# EAGLE board flip flop pcb 1.0 (EAGLE 6.5.0)
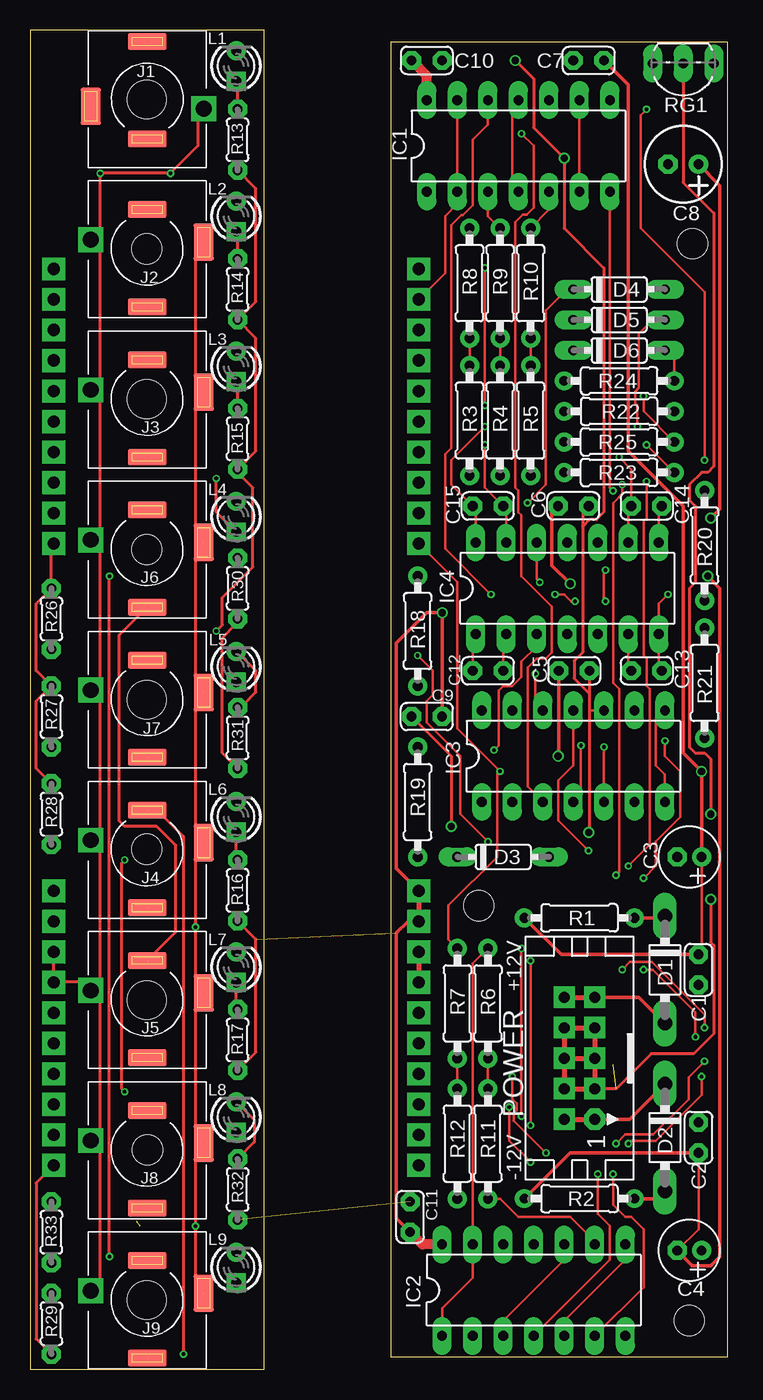
[diagram p0: board, top side]
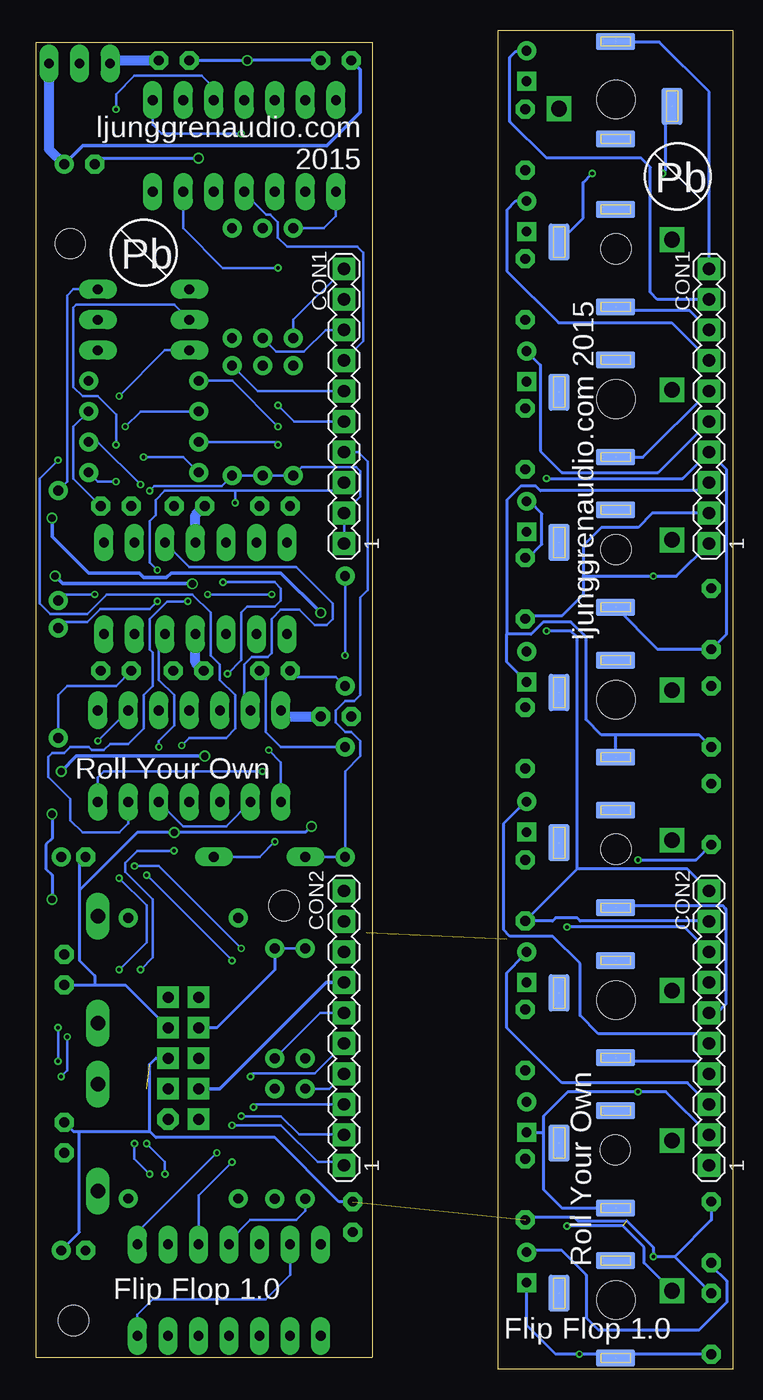
[diagram p1: board, bottom side, seen from below]

Size 58 x 111.5 mm. Coordinates in mm from the lower left corner, seen from the top.
Outline: 0,0 19.5,0 19.5,111.5 0,111.5 0,0
Outline: 30,110.5 30,1 58,1 58,110.5 30,110.5
Copper layers (1*16): Top 0.035mm / dielectric 1.5mm / Bottom 0.035mm
Design rules "hackvana 15 mil pads 24 mil thermal": minimum track width 6mil, minimum drill 0.3mm, track to track 6mil, track to pad 6mil, pad to pad 6mil, via to via 6mil, smd to smd 0mil, copper to edge 6mil, drill to drill 6mil, minimum pad ring 15mil, minimum via ring 6mil, stop-mask expansion 2mil, vias tented up to drill 100mil, thermal gap 24mil
Holes 2.5 mm at 54.86,4.06 55.12,93.73 9.78,18.29 9.72,43.31 9.72,68.26 9.72,93.28 37.34,38.61
Holes 3.2 mm at 9.72,105.73 9.72,80.77 9.72,55.75 9.72,30.73 9.72,5.78

## Footprints (pad centres in the part's own frame; a part is rotated, then mirrored left to right if it is on the bottom)
C025-024X044 = drill 0.813 octagon: 1 -1.27,0; 2 1.27,0
E2-5 = drill 0.813 pad 1.27: + -1.016,0 | drill 0.813 pad 1.27 octagon: - 1.016,0
E2,5-6 = drill 0.813 pad 1.6: + -1.27,0 | drill 0.813 pad 1.6 octagon: - 1.27,0
MA10-1 = drill 1.016 pad 1.9 square: 1 -11.43,0; 2 -8.89,0; 3 -6.35,0; 4 -3.81,0; 5 -1.27,0; 6 1.27,0; 7 3.81,0; 8 6.35,0; 9 8.89,0; 10 11.43,0
DO41-7 = drill 1.2 pad 1.6 long: A 4.445,0; C -4.445,0
DO35-7 = drill 0.813 pad 1.27 long: A 3.81,0; C -3.81,0
DIL14 = drill 0.813 long: 1 -7.62,-3.81; 2 -5.08,-3.81; 3 -2.54,-3.81; 4 0,-3.81; 5 2.54,-3.81; 6 5.08,-3.81; 7 7.62,-3.81; 8 7.62,3.81; 9 5.08,3.81; 10 2.54,3.81; 11 0,3.81; 12 -2.54,3.81; 13 -5.08,3.81; 14 -7.62,3.81
ERTHENVAR-SLOTS = smd 3.2 x 1.4 bottom: NORMLB 0,-3.3; TIPB 0,4.8 | smd 3.2 x 1.4: NORMLT 0,-3.3; TIPT 0,4.8 | smd 1.7 x 3.1 bottom: RING1B -4.7,-0.6 | smd 1.7 x 3.1: RING1T -4.7,-0.6 | drill 1.3 pad 1.778 square: RING2H 4.7,-0.8
LED3MM = drill 0.813 square: A -1.27,0 | drill 0.813: K 1.27,0
CON10L = drill 0.914 pad 1.778 octagon: 1 5.08,1.27 | drill 0.914 pad 1.778 square: 2 5.08,-1.27; 3 2.54,1.27; 4 2.54,-1.27; 5 0,1.27; 6 0,-1.27; 7 -2.54,1.27; 8 -2.54,-1.27; 9 -5.08,1.27; 10 -5.08,-1.27
0207/9 = drill 0.813: 1 -4.58,0; 2 4.58,0
0204/5 = drill 0.813 octagon: 1 -2.54,0; 2 2.54,0
TO92-LINE = drill 0.813 long: 1 2.54,0; 2 0,0; 3 -2.54,0

## Placement (x,y rotation side)
C1  100nF  [C025-024X044]  55.63,33.27 270 top
C2  100nF  [C025-024X044]  55.63,19.3 270 top
C3  10uF  [E2-5]  54.86,42.67 180 top
C4  10uF  [E2-5]  54.86,9.91 180 top
C5  100nF  [C025-024X044]  45.28,58.17 180 top
C6  100nF  [C025-024X044]  45.21,71.88 0 top
C7  100nF  [C025-024X044]  46.48,108.97 0 top
C8  100uF  [E2,5-6]  54.36,100.33 180 top
C9  100nF  [C025-024X044]  33.02,54.36 0 top
C10  100nF  [C025-024X044]  33.02,108.97 180 top
C11  100nF  [C025-024X044]  31.62,12.7 270 top
C12  15pF  [C025-024X044]  38.1,58.17 0 top
C13  15pF  [C025-024X044]  51.31,58.17 180 top
C14  15pF  [C025-024X044]  51.31,71.88 180 top
C15  15pF  [C025-024X044]  38.1,71.88 0 top
CON1-PCB1  CON1  [MA10-1]  1.97,80.18 90 bottom
CON1-PCB2  CON1  [MA10-1]  32.34,80.18 90 bottom
CON2-PCB1  CON2  [MA10-1]  1.97,28.42 90 bottom
CON2-PCB2  CON2  [MA10-1]  32.34,28.42 90 bottom
D1  1N5818  [DO41-7]  52.83,33.27 270 top
D2  1N5818  [DO41-7]  52.83,19.3 270 top
D3  1N4148  [DO35-7]  39.37,42.67 0 top
D4  1N4148  [DO35-7]  49.02,89.92 0 top
D5  1N4148  [DO35-7]  49.02,87.38 0 top
D6  1N4148  [DO35-7]  49.02,84.84 0 top
IC1  CD40106  [DIL14]  40.64,101.85 0 top
IC2  CD40106  [DIL14]  41.91,6.6 0 top
IC3  CD4013  [DIL14]  45.21,51.05 0 top
IC4  TL064  [DIL14]  44.7,65.02 0 top
J1  ERTHENVAR_3.5MM_JACKSLOTS  [ERTHENVAR-SLOTS]  9.75,105.75 0 top
J2  ERTHENVAR_3.5MM_JACKSLOTS  [ERTHENVAR-SLOTS]  9.75,93.25 180 top
J3  ERTHENVAR_3.5MM_JACKSLOTS  [ERTHENVAR-SLOTS]  9.75,80.75 180 top
J4  ERTHENVAR_3.5MM_JACKSLOTS  [ERTHENVAR-SLOTS]  9.75,43.25 180 top
J5  ERTHENVAR_3.5MM_JACKSLOTS  [ERTHENVAR-SLOTS]  9.75,30.75 180 top
J6  ERTHENVAR_3.5MM_JACKSLOTS  [ERTHENVAR-SLOTS]  9.75,68.25 180 top
J7  ERTHENVAR_3.5MM_JACKSLOTS  [ERTHENVAR-SLOTS]  9.75,55.75 180 top
J8  ERTHENVAR_3.5MM_JACKSLOTS  [ERTHENVAR-SLOTS]  9.75,18.25 180 top
J9  ERTHENVAR_3.5MM_JACKSLOTS  [ERTHENVAR-SLOTS]  9.75,5.75 180 top
L1  green  [LED3MM]  17.15,108.5 90 top
L2  green  [LED3MM]  17.15,96 90 top
L3  green  [LED3MM]  17.15,83.5 90 top
L4  orange  [LED3MM]  17.15,71 90 top
L5  orange  [LED3MM]  17.15,58.5 90 top
L6  green  [LED3MM]  17.15,46 90 top
L7  green  [LED3MM]  17.15,33.5 90 top
L8  orange  [LED3MM]  17.15,21 90 top
L9  orange  [LED3MM]  17.15,8.5 90 top
POWER  power  [CON10L]  45.72,25.91 270 top
R1  10R  [0207/9]  45.72,37.59 180 top
R2  10R  [0207/9]  45.72,14.22 180 top
R3  100k  [0207/9]  36.58,78.99 90 top
R4  100k  [0207/9]  39.12,78.99 90 top
R5  100k  [0207/9]  41.66,78.99 90 top
R6  100k  [0207/9]  38.1,30.48 270 top
R7  100k  [0207/9]  35.56,30.48 270 top
R8  100k  [0207/9]  36.58,90.42 90 top
R9  100k  [0207/9]  39.12,90.42 90 top
R10  100k  [0207/9]  41.66,90.42 90 top
R11  100k  [0207/9]  38.1,18.8 270 top
R12  100k  [0207/9]  35.56,18.8 270 top
R13  1k  [0204/5]  17.27,102.36 90 top
R14  1k  [0204/5]  17.27,89.92 90 top
R15  1k  [0204/5]  17.27,77.47 90 top
R16  1k  [0204/5]  17.27,39.88 90 top
R17  1k  [0204/5]  17.27,27.43 90 top
R18  1k  [0207/9]  32.26,61.47 90 top
R19  100k  [0207/9]  32.26,47.24 270 top
R20  1k  [0207/9]  56.13,68.58 90 top
R21  100k  [0207/9]  56.13,57.15 90 top
R22  1k  [0207/9]  49.02,79.76 180 top
R23  100k  [0207/9]  49.02,74.68 0 top
R24  1k  [0207/9]  49.02,82.3 0 top
R25  100k  [0207/9]  49.02,77.22 0 top
R26  100k  [0204/5]  1.78,62.48 270 top
R27  100k  [0204/5]  1.78,54.36 270 top
R28  100k  [0204/5]  1.78,46.23 270 top
R29  100k  [0204/5]  1.78,3.81 270 top
R30  1k  [0204/5]  17.27,65.02 270 top
R31  1k  [0204/5]  17.27,52.58 270 top
R32  1k  [0204/5]  17.27,14.99 270 top
R33  1k  [0204/5]  1.78,11.43 90 top
RG1  LM2931 5V  [TO92-LINE]  54.36,108.71 180 top

## Library data of the parts
C1-C15 D1-D6 IC1-IC4 J1-J9 L1-L9 R1-R33 RG1 = Roll Your Own
CON1-PCB1 CON1-PCB2 CON2-PCB1 CON2-PCB2 POWER = Roll Your Own; OC_FARNELL: unknown; OC_NEWARK: unknown

## Nets
0V: C1.2 C2.1 C3.- C4.+ C5.1 C6.2 C7.1 C8.- C9.1 C10.1 C11.1 CON1-PCB1.1 CON1-PCB1.2 CON1-PCB2.1 CON1-PCB2.2 CON2-PCB1.7 CON2-PCB1.8 CON2-PCB2.7 CON2-PCB2.8 IC1.7 IC2.1 IC2.7 IC2.13 IC3.7 IC3.8 IC3.10 J1.RING1B J1.RING1T J1.RING2H J2.RING1B J2.RING1T J2.RING2H J3.RING1B J3.RING1T J3.RING2H J4.RING1B J4.RING1T J4.RING2H J5.RING1B J5.RING1T J5.RING2H J6.RING1B J6.RING1T J6.RING2H J7.RING1B J7.RING1T J7.RING2H J8.RING1B J8.RING1T J8.RING2H J9.RING1B J9.RING1T J9.RING2H POWER.3 POWER.4 POWER.5 POWER.6 POWER.7 POWER.8 R3.1 R4.1 R5.1 R6.1 R7.1 R26.1 R27.1 R28.1 R29.1 R30.2 R31.2 R32.2 R33.2 RG1.2
+5V: C8.+ C9.2 C10.2 C11.2 CON2-PCB1.9 CON2-PCB1.10 CON2-PCB2.9 CON2-PCB2.10 IC1.14 IC2.14 IC3.14 R13.1 R14.1 R15.1 R16.1 R17.1 RG1.3
+12V: C1.1 C3.+ C5.2 C7.2 IC4.4 R1.2 RG1.1
-12V: C2.2 C4.- C6.1 IC4.11 R2.2
C1-1: CON1-PCB1.6 J3.TIPB J3.TIPT
C1-2: CON1-PCB2.6 R5.2 R10.1
C2-1: CON2-PCB1.4 J5.TIPB J5.TIPT
C2-2: CON2-PCB2.4 R7.2 R12.1
D2-1: CON2-PCB1.6 J4.TIPB J4.TIPT
D2-2: CON2-PCB2.6 R6.2 R11.1
L1-1: CON1-PCB1.9 L1.K
L1-2: CON1-PCB2.9 IC1.2 IC1.13
L2-1: CON1-PCB1.7 L2.K
L2-2: CON1-PCB2.7 IC1.4 IC1.11
L3-1: CON1-PCB1.5 L3.K
L3-2: CON1-PCB2.5 IC1.6 IC1.9
L6-1: CON2-PCB1.5 L6.K
L6-2: CON2-PCB2.5 IC2.5 IC2.8
L7-1: CON2-PCB1.3 L7.K
L7-2: CON2-PCB2.3 IC2.3 IC2.10
N$2: IC1.1 R8.2
N$3: IC3.2 IC3.5 IC4.5
N$4: IC1.3 R9.2
N$5: IC1.5 R10.2
N$6: IC2.9 R11.2
N$8: IC2.11 R12.2
N$16: IC1.12 IC3.6
N$17: IC1.10 IC3.4
N$18: IC1.8 IC3.3
N$19: IC2.4 IC3.11
N$21: IC2.6 IC3.9
N$22: IC3.1 IC4.3
N$23: C12.2 IC4.2 R19.1
N$24: C12.1 IC4.1 R18.1
N$25: D3.A R18.2
N$27: C13.2 IC4.6 R21.1
N$28: C13.1 IC4.7 R20.1
N$29: D4.A R20.2
N$31: IC3.13 IC4.10
N$32: IC3.12 IC4.12
N$33: C15.2 IC4.13 R25.1
N$34: C15.1 IC4.14 R24.1
N$35: D6.A R24.2
N$36: D1.C R1.1
N$38: C14.2 IC4.9 R23.1
N$39: C14.1 IC4.8 R22.1
N$40: D5.A R22.2
N$42: D1.A POWER.9 POWER.10
N$43: D2.C POWER.1 POWER.2
N$44: D2.A R2.1
N$45: L1.A R13.2
N$46: L2.A R14.2
N$47: L3.A R15.2
N$48: L4.K R30.1
N$49: L5.K R31.1
N$51: L6.A R16.2
N$52: L7.A R17.2
N$53: L8.K R32.1
N$54: L9.K R33.1
Q1-1: CON1-PCB1.4 J5.NORMLB J5.NORMLT J6.TIPB J6.TIPT L4.A R26.2
Q1-2: CON1-PCB2.4 D3.C R19.2
Q2-1: CON2-PCB1.2 J8.TIPB J8.TIPT L8.A R28.2
Q2-2: CON2-PCB2.2 D5.C R23.2
QB1-1: CON1-PCB1.3 J7.TIPB J7.TIPT L5.A R27.2
QB1-2: CON1-PCB2.3 D4.C R21.2
QB2-1: CON2-PCB1.1 J4.NORMLB J4.NORMLT J9.TIPB J9.TIPT L9.A R29.2
QB2-2: CON2-PCB2.1 D6.C R25.2
R1-1: CON1-PCB1.8 J2.TIPB J2.TIPT
R1-2: CON1-PCB2.8 R4.2 R9.1
S1-1: CON1-PCB1.10 J1.TIPB J1.TIPT
S1-2: CON1-PCB2.10 R3.2 R8.1

## Tracks (layer width: path | path; a pad name or v marks a point on that pad's centre or on a via)
0V  (via drill 0.3, 0.6)  (11 unrouted)
  Top 0.22: IC1.7 48.26,73.41 v48.51,73.15 | CON1-PCB2.1 35.56,65.53 35.56,53.34 v39.12,49.78 38.86,49.53 38.86,42.67 34.8,38.61 34.8,35.81 R7.1 | IC2.1 34.29,5.08 36.83,7.62 IC2.13 36.83,33.79 R6.1 | IC3.8 52.07,54.1 52.07,50.29 52.83,49.53 IC3.7 | IC3.10 46.55,54.86
  Top 0.254: J9.RING2H 5.84,7.34 5.84,18.54 | 5.84,18.54 5.33,19.05 J8.RING2H | 5.84,18.54 5.84,30.76 | 5.84,30.76 J5.RING2H 4.34,32.26 2.03,32.26 | 5.84,30.76 5.84,44.2 | 5.84,44.2 5.84,56.39 | 5.84,56.39 5.84,69.09 | 5.84,69.09 5.84,80.76 | 5.84,80.76 J3.RING2H | 5.84,80.76 5.84,93.26 | 5.84,93.26 J2.RING2H | 5.84,93.26 v5.84,99.57 v11.68,99.57 13.97,101.85 13.97,104.47 J1.RING2H | J3.RING1T 13.78,82.02 | 13.78,82.02 13.78,93.18 J2.RING1T | 13.78,43.94 v13.78,36.83 13.78,32.02 | 13.78,43.94 13.78,56.39 | 13.78,56.39 13.78,68.83 | 13.78,68.83 13.78,82.02 | J5.RING1T 13.78,32.02 | J8.RING1T 13.78,19.52 | 13.78,19.52 13.78,32.02 | J9.RING1T 13.78,7.02 v13.78,11.94 13.78,19.52 | CON2-PCB1.7 CON2-PCB1.8 | v6.6,9.4 v6.6,66.04 | CON1-PCB1.1 1.78,68.56 R26.1 0.51,63.75 0.51,58.17 R27.1 0.51,55.63 0.51,50.04 R28.1 | R31.2 16,51.31 16,60.9 17.14,62.1 R30.2 | C9.1 35.05,51.05 v35.05,45.21 | C5.1 46.55,56.26 | 46.55,56.26 46.55,54.86 46.55,44.77 v46.48,44.7 | C6.2 45.97,71.37 45.97,70.17 | 45.97,70.17 45.97,59.69 45.28,58.99 45.28,57.53 46.55,56.26 | v40.39,108.97 41.91,107.44 41.91,103.38 v44.45,100.84 44.45,95 47.75,91.69 47.75,71.37 47.12,70.74 46.55,70.74 45.97,70.17 | RG1.2 54.36,98.81 56.9,96.27 56.9,75.18 56.39,74.68 55.88,74.68 54.86,73.66 54.86,72.39 55.37,71.88 55.37,65.53 54.86,65.02 54.86,51.82 55.37,51.31 56.13,51.31 56.64,50.8 v56.64,46.23 | v56.64,39.12 56.64,35.56 56.9,35.31 56.9,27.94 55.24,26.29 51.69,26.29 48.77,23.37 POWER.3 | J6.RING2H 5.8,69.05 5.84,69.09 | J6.RING1T 13.8,68.85 13.78,68.83 | J7.RING2H 5.68,56.55 5.84,56.39 | J7.RING1T 13.82,56.35 13.78,56.39 | J4.RING2H 5.7,44.05 5.84,44.2
  Top 0.254: J4.RING1T 13.87,43.85 13.78,43.94
  Top 0.406: POWER.6 POWER.5 | CON2-PCB2.8 CON2-PCB2.7 | POWER.4 POWER.3 POWER.7 POWER.8 POWER.4
  Bottom 0.22: v48.51,73.15 48.13,73.53 42.54,73.53 R5.1 R4.1 R3.1 35.87,75.12 31.3,75.12 30.99,74.8 30.99,72.64 CON1-PCB2.2 CON1-PCB2.1 | v39.12,49.78 52.32,49.78 52.83,49.28 IC3.7 | R7.1 R6.1 | IC2.7 49.53,4.57 48.26,5.84 38.86,5.84 36.83,7.87 IC2.13
  Bottom 0.254: v5.84,99.57 5.59,99.82 5.59,104.39 5.05,104.93 J1.RING1T | J2.RING1T 12.45,95.85 12.45,98.81 v11.68,99.57 | J9.RING2H 7.37,8.87 7.37,10.16 9.14,11.94 v13.78,11.94 | CON2-PCB1.8 4.03,36.83 v13.78,36.83 | R29.1 4.83,9.4 | 4.83,9.4 v6.6,9.4 6.6,10.16 8.83,12.38 12.89,12.38 13.21,12.7 17.02,12.7 R32.2 | CON1-PCB1.1 4.68,66.04 v6.6,66.04 12.45,66.04 | CON1-PCB1.2 6.68,71.29 7.87,70.1 10.92,70.1 12.45,68.58 12.45,66.04 | 12.45,66.04 12.45,64.52 14.22,62.74 17.02,62.74 R30.2 | R33.2 1.78,12.45 4.83,9.4 | C11.1 32.77,13.97 38.1,19.3 48.01,19.3 48.51,19.81 | 48.51,19.81 48.51,25.4 48.01,25.91 POWER.5 | C2.1 54.86,19.81 54.36,19.81 | 54.36,19.81 48.51,19.81 | C4.+ 54.36,11.43 54.36,19.81 | C1.2 53.09,32 | 53.09,32 50.55,32 POWER.7 | C3.- 54.36,42.16 54.36,39.88 | 54.36,39.88 54.36,34.04 53.09,32.77 53.09,32 | v35.05,45.21 35.56,44.7 v46.48,44.7 49.53,44.7 54.36,39.88 | C10.1 v40.39,108.97 C7.1 | C8.- 52.58,100.84 v44.45,100.84 | v56.64,46.23 56.64,44.2 57.15,43.69 57.15,41.66 56.64,41.15 v56.64,39.12 | R6.1 38.1,33.27 42.93,28.45 POWER.8
  Bottom 0.305: CON2-PCB2.7 33.81,32.23 42.67,23.37 POWER.4
+5V  (via drill 0.3, 0.6)  (1 unrouted)
  Top 0.254: R17.1 18.8,26.42 18.8,35.81 17.14,37.47 17.14,37.27 17.27,37.4 R16.1 | v15.49,61.47 16,61.98 16,64.26 18.54,66.8 18.54,73.41 17.27,74.68 R15.1 | 17.14,74.36 17.27,74.49 R15.1 | R15.1 18.8,76.45 18.8,85.85 R14.1 18.8,88.9 18.8,98.3 R13.1
  Top 0.305: C8.+ 57.4,98.55 57.4,71.63 v56.64,70.87 | C9.2 v34.29,62.99 33.02,62.99 30.48,60.45 30.48,41.71 CON2-PCB2.10 | C11.2 30.48,12.57 30.48,36.32 31.46,37.31 CON2-PCB2.9
  Top 0.406: CON2-PCB2.10 CON2-PCB2.9
  Top 0.813: IC1.14 33.02,107.7 C10.2 | IC2.14 32.64,10.41 C11.2
  Bottom 0.254: 12.95,41.66 R16.1 14.99,37.34 14.73,37.59 12.95,37.59 12.7,37.34 2,37.34 CON2-PCB1.9 | 12.95,41.66 12.95,60.96 13.46,61.47 v15.49,61.47 | CON2-PCB1.10 3.78,41.66 12.95,41.66
  Bottom 0.305: C10.2 30.99,108.2 30.99,104.65 33.78,101.85 54.1,101.85 C8.+ | v56.64,70.87 56.64,69.34 53.59,66.29 49.4,66.29 49.02,65.91 47.12,65.91 46.74,66.29 37.59,66.29 v34.29,62.99
  Bottom 0.813: RG1.3 56.9,101.6 C8.+ | IC3.14 37.08,54.36 C9.2
+12V  (via drill 0.6)
  Top 0.22: C1.1 55.88,34.8 C3.+
  Top 0.305: R1.2 44.19,34.54 C1.1 | C3.+ v55.88,49.78 54.36,51.31 54.36,71.88 49.78,76.45 49.78,106.93 C7.2 | v43.94,51.05 44.01,51.12 C5.2
  Bottom 0.305: v55.88,49.78 54.61,51.05 v43.94,51.05
  Bottom 0.813: RG1.1 51.31,108.97 C7.2 | C5.2 44.7,58.86 IC4.4
-12V  (via drill 0.6)
  Top 0.22: C2.2 55.63,11.68 C4.-
  Top 0.305: R2.2 44.95,18.03 C2.2 | C4.- 55.12,8.64 56.64,8.64 57.4,9.4 57.4,65.02 v56.39,66.04 | C6.1 43.43,71.37 43.43,66.93 v44.96,65.41
  Bottom 0.305: v44.96,65.41 55.75,65.41 v56.39,66.04
  Bottom 0.813: IC4.11 44.7,71.12 C6.1
C1-1  (1 unrouted)
  Bottom 0.254: J3.TIPT 7.47,75.95 CON1-PCB1.6
C1-2
  Top 0.22: R10.1 R5.2
  Bottom 0.22: CON1-PCB2.6 39.54,81.45 R5.2
C2-1  (1 unrouted)
  Bottom 0.254: CON2-PCB1.4 3.02,25.65 9.14,25.65 9.44,25.95 J5.TIPT
C2-2
  Top 0.22: R7.2 R12.1
  Bottom 0.22: CON2-PCB2.4 33.57,23.38 R12.1
D2-1  (1 unrouted)
  Bottom 0.254: J4.TIPT 9.59,38.61 0.83,38.61 0.57,38.35 0.57,30.42 1.3,29.69 CON2-PCB1.6
D2-2
  Top 0.22: R11.1 R6.2
  Bottom 0.22: CON2-PCB2.6 34.31,29.69 R6.2
L1-1
  Bottom 0.254: CON1-PCB1.9 6.27,89.07 6.86,89.66 6.86,100.08 7.62,100.84 15.49,100.84 18.54,103.89 18.54,109.22 18.03,109.73 17.19,109.73 L1.K
L1-2
  Top 0.22: CON1-PCB2.9 34.54,91.27 34.54,96.01 35.56,97.03 IC1.2 IC1.13
L2-1
  Bottom 0.254: CON1-PCB1.7 1.97,84.01 5.08,87.12 14.48,87.12 18.8,91.44 18.8,96.52 18.03,97.28 17.16,97.28 L2.K
L2-2
  Top 0.22: IC1.11 40.13,105.16 40.13,98.81 40.64,98.3 IC1.4
  Bottom 0.22: CON1-PCB2.7 30.73,85.6 30.73,92.96 31.24,93.47 37.08,93.47 37.85,94.23 37.85,95.5 38.48,96.14 38.8,96.14 40.64,97.98 IC1.4
L3-1
  Bottom 0.254: CON1-PCB1.5 6.21,74.68 14.22,74.68 16,76.45 16,83.62 L3.K
L3-2  (via drill 0.3)
  Top 0.22: v37.85,80.26 v37.85,91.69 | IC1.9 IC1.6
  Bottom 0.22: CON1-PCB2.5 36.5,78.91 v37.85,80.26 | v37.85,91.69 42.42,91.69 45.72,95 IC1.6
L6-1
  Bottom 0.254: CON2-PCB1.5 2.76,27.94 11.18,27.94 12.7,29.46 12.7,33.78 14.99,36.07 18.54,36.07 19.05,36.58 19.05,45.47 17.4,47.11 L6.K
L6-2  (via drill 0.3)
  Top 0.22: IC2.5 44.45,4.06 49.53,9.14 IC2.8 | v42.93,18.03 40.26,20.7 40.26,21.34 40.51,21.59 40.51,22.16 40.13,22.54 v40.13,24.38
  Bottom 0.22: IC2.8 49.53,11.43 v42.93,18.03 | v40.13,24.38 39.88,24.64 34.8,24.64 32.34,27.09 CON2-PCB2.5
L7-1
  Bottom 0.254: CON2-PCB1.3 3.78,23.88 14.22,23.88 18.8,28.45 18.8,33.02 18.42,33.4 L7.K
L7-2  (via drill 0.3)
  Top 0.22: IC2.3 39.37,4.06 44.45,9.14 IC2.10 | v41.66,17.27 39.88,19.05 v39.88,21.84
  Bottom 0.22: IC2.10 44.45,14.48 v41.66,17.27 | v39.88,21.84 39.66,22.07 CON2-PCB2.3
N$2
  Bottom 0.22: R8.2 34.03,95 33.02,96.01 IC1.1
N$3  (via drill 0.3)
  Top 0.22: IC3.5 v47.75,51.82
  Bottom 0.22: IC3.2 42.16,45.21 45.72,45.21 IC3.5 | v47.75,51.82 47.75,52.32 46.48,53.59 46.48,56.13 47.75,57.4 47.75,60.71 IC4.5
N$4
  Top 0.22: R9.2 38.1,96.02 IC1.3
N$5
  Top 0.22: R10.2 43.18,96.53 IC1.5
N$6
  Top 0.22: IC2.9 46.99,10.67 44.96,12.7 40.64,12.7 39.12,14.22 R11.2
N$8
  Bottom 0.22: IC2.11 41.91,10.67 40.13,12.45 36.32,12.45 35.56,13.21 R12.2
N$16  (via drill 0.3)
  Top 0.22: v45.34,63.94 45.02,63.94 44.45,64.52 v43.69,64.52 | v38.35,64.52 34.54,68.33 34.54,76.2 35.05,76.71 35.05,95.25 35.88,96.08 36.01,96.08 36.83,96.9 36.83,102.36 38.1,103.63 IC1.12
  Bottom 0.22: IC3.6 50.29,45.47 51.05,44.7 54.1,44.7 55.12,45.72 55.12,47.5 56.96,49.34 56.96,50.99 56.64,51.31 55.63,51.31 55.12,51.82 53.59,51.82 53.34,51.56 52.32,51.56 51.82,52.07 50.29,52.07 49.02,53.34 49.02,56.13 48.26,56.9 48.26,59.69 48.51,59.94 48.51,62.48 47.05,63.94 v45.34,63.94 | v43.69,64.52 v38.35,64.52
N$17  (via drill 0.3)
  Top 0.22: IC3.4 45.85,47.88 v45.85,51.94 | v56.13,75.69 56.13,89.66 50.8,95 50.8,104.39 v51.31,104.9
  Bottom 0.22: v45.85,51.94 45.21,52.58 42.16,52.58 41.4,53.34 41.4,56.13 42.67,57.4 42.67,58.67 43.43,59.44 43.43,62.99 44.96,64.52 52.07,64.52 53.72,62.87 56.77,62.87 57.66,63.75 57.66,74.17 v56.13,75.69 | v51.31,104.9 51.31,106.17 49.78,107.7 44.2,107.7 43.18,106.68 IC1.10
N$18  (via drill 0.3)
  Top 0.22: IC3.3 41.4,48.51 41.4,58.42 42.16,59.18 42.93,59.18 43.43,59.69 43.43,63.5 40.89,66.04 40.89,71.12 40.64,71.37 40.64,73.15 40.39,73.41 40.39,95.5 41.02,96.14 41.34,96.14 41.91,96.71 41.91,101.85 v40.89,102.87
  Bottom 0.22: v40.89,102.87 47.5,102.87 48.26,103.63 IC1.8
N$19  (via drill 0.3)
  Top 0.22: IC2.4 48.26,9.14 48.26,11.94 47.24,12.95 v47.24,16.26 | v48.77,18.8 49.53,19.56 51.88,19.56 54.8,22.48 54.8,24.32 v56.13,25.65 | v56.13,28.45 56.13,29.53 51.75,33.91 49.91,33.91 v49.28,33.27 | v46.48,43.18 43.94,45.72 43.94,49.02 45.21,50.29 IC3.11
  Bottom 0.22: v47.24,16.26 47.24,17.27 v48.77,18.8 | v56.13,25.65 v56.13,28.45 | v49.28,33.27 48.26,34.29 48.26,39.12 50.55,41.4 50.55,42.16 49.53,43.18 v46.48,43.18
N$21  (via drill 0.3)
  Top 0.22: IC2.6 51.05,6.86 51.05,11.68 50.04,12.7 49.53,12.7 48.51,13.72 v48.51,16.26 | v49.78,18.8 50.04,19.05 52.07,19.05 55.88,22.86 v55.88,24.38 | v55.37,27.69 55.37,29.72 51.82,33.27 v51.05,33.27 | v51.05,40.89 52.07,41.91 52.07,43.94 54.1,45.97 54.1,49.78 52.83,51.05 v52.83,52.32
  Bottom 0.22: v48.51,16.26 49.78,17.53 v49.78,18.8 | v55.88,24.38 55.37,24.89 v55.37,27.69 | v51.05,33.27 48.77,35.56 48.77,38.61 v51.05,40.89 | v52.83,52.32 50.8,54.36 50.29,54.36 IC3.9
N$22  (via drill 0.3)
  Top 0.22: v38.61,51.56 38.99,51.94 38.99,56.52 39.37,56.9 40.13,56.9 40.89,57.66 40.89,58.93 42.16,60.2 IC4.3
  Bottom 0.22: IC3.1 37.59,50.55 v38.61,51.56
N$23
  Top 0.22: C12.2 39.37,60.96 IC4.2
  Bottom 0.22: R19.1 37.6,51.82 38.86,53.09 38.86,57.66 C12.2
N$24
  Top 0.22: C12.1 36.83,60.96 IC4.1
  Bottom 0.22: R18.1 33.03,57.66 36.32,57.66 C12.1
N$25  (via drill 0.3)
  Top 0.22: v32.26,59.44 33.53,58.17 33.53,56.13 33.02,55.63 33.02,53.85 35.81,51.05 35.81,46.23 v38.1,43.94
  Bottom 0.22: R18.2 v32.26,59.44 | v38.1,43.94 39.37,42.67 D3.A
N$27
  Top 0.22: IC4.6 49.78,58.42 C13.2
  Bottom 0.22: R21.1 56.13,56.13 55.37,56.9 51.31,56.9 C13.2
N$28  (via drill 0.3)
  Top 0.22: C13.1 52.32,58.42 IC4.7 52.32,63.75 v53.09,64.52
  Bottom 0.22: R20.1 55.62,64.52 v53.09,64.52
N$29
  Bottom 0.22: R20.2 55.37,73.92 55.37,89.41 54.86,89.92 D4.A
N$31
  Bottom 0.22: IC4.10 45.21,66.8 36.32,66.8 33.27,63.75 33.27,62.48 33.78,61.98 34.8,61.98 36.07,63.25 37.59,63.25 38.35,62.48 38.35,59.63 38.67,59.31 40.01,59.31 40.64,58.67 40.64,55.37 IC3.13
N$32  (via drill 0.3)
  Top 0.22: IC3.12 42.04,55.5 v42.04,57.91 | v42.42,65.53 42.16,65.79 IC4.12
  Bottom 0.22: v42.04,57.91 40.89,59.05 40.89,62.99 40.39,63.5 38.1,63.5 37.59,64.01 37.59,65.02 38.1,65.53 v42.42,65.53
N$33  (via drill 0.3)
  Top 0.22: IC4.13 39.62,71.63 C15.2 37.85,73.41 v37.85,76.96
  Bottom 0.22: v37.85,76.96 38.1,77.22 R25.1
N$34  (via drill 0.3)
  Top 0.22: IC4.14 37.08,71.63 C15.1 35.05,73.66 35.05,75.69 v37.85,78.49
  Bottom 0.22: v37.85,78.49 41.66,82.3 R24.1
N$35
  Top 0.22: R24.2 53.6,84.57 53.34,84.84 D6.A
N$36
  Top 0.305: R1.1 52.7,37.59 D1.C
N$38  (via drill 0.3)
  Top 0.22: IC4.9 49.78,71.63 C14.2 50.04,74.93 v49.02,75.95
  Bottom 0.22: v49.02,75.95 45.71,75.95 R23.1
N$39
  Top 0.22: IC4.8 52.32,71.63 C14.1
  Bottom 0.22: C14.1 54.86,74.17 54.86,78.49 53.6,79.75 R22.1
N$40  (via drill 0.3)
  Top 0.22: v50.55,78.49 50.55,80.26 50.35,80.45 50.35,81.41 50.67,81.72 50.67,86.23 51.82,87.38 D5.A
  Bottom 0.22: R22.2 49.28,79.76 v50.55,78.49
N$42
  Top 0.305: POWER.9 50.67,30.99 D1.A
  Top 0.406: POWER.10 POWER.9
N$43
  Top 0.305: POWER.1 49.91,20.83 D2.C
  Top 0.406: POWER.2 POWER.1
N$44
  Top 0.305: D2.A 52.83,14.73 52.32,14.22 R2.1
N$45
  Top 0.254: R13.2 17.27,107.11 L1.A
N$46
  Top 0.254: R14.2 17.27,94.61 L2.A
N$47
  Top 0.254: R15.2 17.27,82.11 L3.A
N$48
  Bottom 0.254: R30.1 17.02,67.56 15.88,68.71 15.88,71.25 16.9,72.27 L4.K
N$49
  Top 0.254: R31.1 17.53,55.37 17.78,55.37 18.8,56.39 18.8,58.17 17.19,59.77 L5.K
N$51
  Top 0.254: R16.2 17.15,42.79 L6.A
N$52
  Top 0.254: R17.2 17.15,30.09 L7.A
N$53
  Top 0.254: L8.K 18.67,20.77 18.67,18.93 R32.1
N$54
  Bottom 0.254: R33.1 1.78,8.64 0.51,7.37 0.51,5.59 2.79,3.3 11.18,3.3 12.19,4.32 12.19,7.87 14.22,9.91 17.01,9.91 L9.K
Q1-1  (via drill 0.3)  (2 unrouted)
  Top 0.254: v15.49,74.17 15.49,71.39 L4.A | J5.NORMLB 12.13,36.43 12.13,43.62 10.54,45.21 7.87,45.21 7.44,45.65 7.44,61.14 J6.TIPT
  Bottom 0.254: v15.49,74.17 4.17,74.17 CON1-PCB1.4 1.95,76.37 0.51,74.93 0.51,61.21 R26.2 6.24,59.94 J6.TIPT
Q1-2
  Bottom 0.22: D3.C 32.27,42.67 R19.2 32.26,49.78 30.99,51.05 30.99,52.32 31.75,53.09 32.26,53.09 33.02,53.85 33.02,54.86 32.26,55.63 31.5,55.63 30.99,56.13 30.99,64.26 30.35,64.9 30.35,75.56 31.16,76.37 CON1-PCB2.4
Q2-1  (via drill 0.3)  (1 unrouted)
  Top 0.254: v7.87,23.11 7.62,23.37 7.62,42.16 v7.87,42.42
  Bottom 0.254: CON2-PCB1.2 5.56,23.11 v7.87,23.11 13.72,23.11 15.75,21.08 15.75,19.56 | J8.TIPT 14.21,13.45 15.75,14.99 15.75,19.56 | v7.87,42.42 3.05,42.42 R28.2 | L8.A 15.92,19.73 15.75,19.56
Q2-2  (via drill 0.3)
  Top 0.22: v40.89,21.08 v40.89,35.05 | v49.78,41.91 51.56,43.69 51.56,56.64 51.31,56.9 51.31,59.18 51.05,59.44 51.05,70.61 51.31,70.87 v51.31,73.91 | R23.2 v51.32,76.96 v51.31,76.96
  Bottom 0.22: CON2-PCB2.2 32.38,19.56 36.07,19.56 37.59,21.08 v40.89,21.08 | v40.89,35.05 47.75,41.91 v49.78,41.91 | v51.31,73.91 52.84,73.91 R23.2 | D5.C 46.48,88.65 54.61,88.65 54.86,88.39 54.86,81.79 54.1,81.03 52.83,81.03 51.31,79.5 v51.31,76.96
QB1-1  (1 unrouted)
  Bottom 0.254: R27.2 2.79,52.83 9.65,52.83 | 9.65,52.83 10.92,52.83 12.19,54.1 12.19,60.96 13.46,62.23 15.75,62.23 16.76,61.21 18.8,61.21 | CON1-PCB1.3 2.65,73.15 16,73.15 16.38,73.53 17.65,73.53 18.8,72.39 18.8,61.21 | J7.TIPT 9.75,52.73 9.65,52.83 | L5.A 18.8,58.88 18.8,61.21
QB1-2  (via drill 0.3)
  Top 0.22: v47.88,63.94 47.75,64.07 47.75,66.42 v47.88,66.55 | D4.C 44.7,89.92 42.93,88.14 42.93,73.66 v41.4,72.14
  Bottom 0.22: R21.2 55.63,62.23 53.72,62.23 52.64,63.31 48.51,63.31 v47.88,63.94 | v47.88,66.55 48.51,67.18 48.51,70.61 48.01,71.12 48.01,72.39 47.24,73.15 41.4,73.15 | 41.4,73.15 33.03,73.15 CON1-PCB2.3 | v41.4,72.14 41.4,73.15
QB2-1  (via drill 0.3)  (2 unrouted)
  Top 0.254: J9.TIPT 9.43,1.27 | CON2-PCB1.1 0.51,15.53 0.51,2.54 R29.2 | J4.NORMLT 10.6,46.55 12.76,44.39 v12.76,1.27
  Bottom 0.254: R29.2 9.14,1.27 | 9.14,1.27 9.43,1.27 J9.TIPT | 9.14,1.27 9.46,0.95 J9.TIPT | J9.TIPT 10.07,1.27 v12.76,1.27 14.73,1.27 17.15,3.69 L9.A
QB2-2  (via drill 0.3)
  Top 0.22: v41.66,20.32 v41.66,34.04 | v48.77,41.15 49.02,41.4 49.02,56.64 48.51,57.15 48.51,72.14 49.28,72.9 v49.28,73.66 | v51.05,81.03 51.05,79.76 R25.2
  Bottom 0.22: CON2-PCB2.1 32.63,17.27 34.54,17.27 37.59,20.32 v41.66,20.32 | v41.66,34.04 v48.77,41.15 | v49.28,73.66 52.83,77.22 R25.2 | D6.C 47.24,84.84 v51.05,81.03
R1-1  (1 unrouted)
  Bottom 0.254: CON1-PCB1.8 3.57,88.14 8.64,88.14 8.95,88.45 J2.TIPT
R1-2
  Top 0.22: R4.2 R9.1
  Bottom 0.22: R9.1 37.98,84.71 35.69,84.71 33.86,86.53 CON1-PCB2.8
S1-1  (1 unrouted)
  Bottom 0.254: CON1-PCB1.10 1.97,106.36 6.1,110.49 9.69,110.49 J1.TIPT
S1-2
  Top 0.22: R3.2 R8.1
  Bottom 0.22: R8.1 36.58,87.38 CON1-PCB2.10

## Text on the board
tPlace: +12V | -12V
bPlace: ljunggrenaudio.com / 2015 | Pb | Pb | CON1 | CON1 | ljunggrenaudio.com 2015 | Roll Your Own | CON2 | CON2 | Roll Your Own | Flip Flop 1.0 | Flip Flop 1.0